# Altium PCB LAN7800-Board.PcbDoc (part 1 of 2)
Units mm, origin at the board's own origin, x right, y up, seen from the top; angles counter-clockwise.
Board outline 69 x 30 mm, 4 copper layers (Top Layer, Layer 1, Layer 2, Bottom Layer), stack 1.587 mm thick; 68 components, 49 nets, 280 pads, 123 vias.
Unrouted connection lines stored in the file: 60.
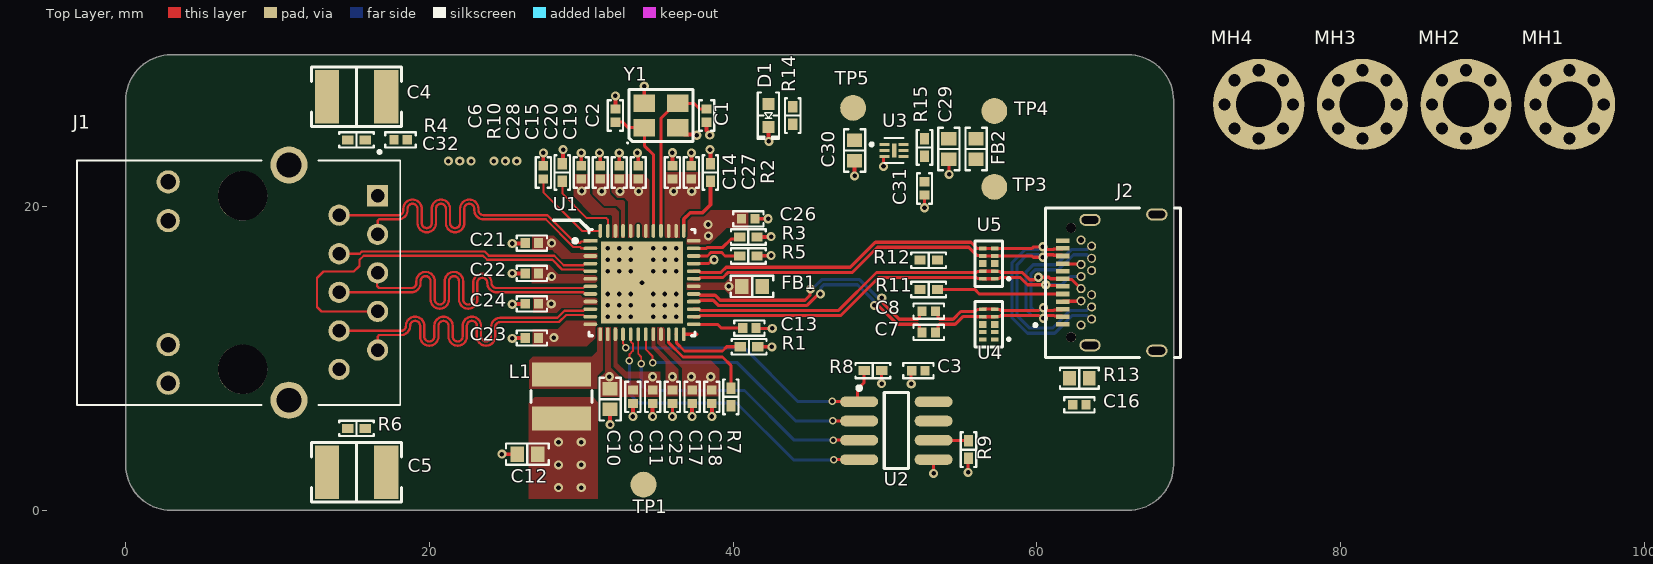
[diagram p0: Top Layer view]
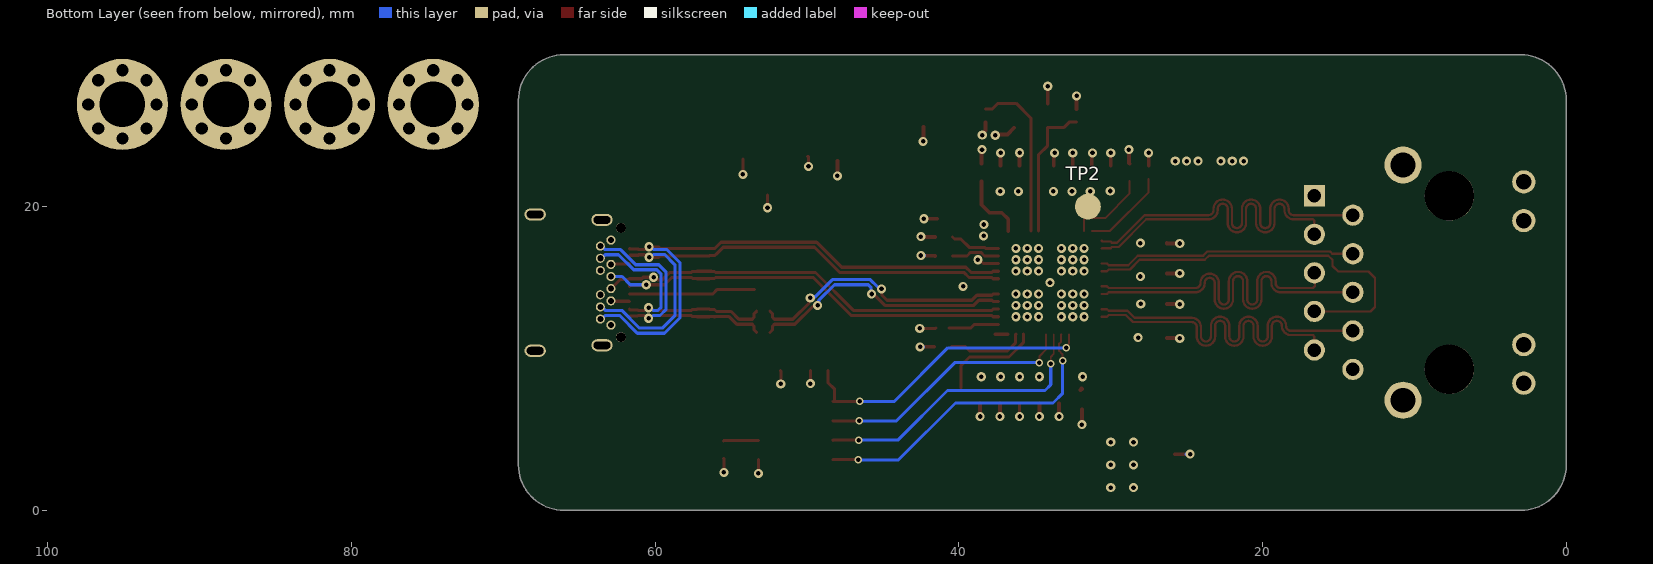
[diagram p1: Bottom Layer view, seen from below]
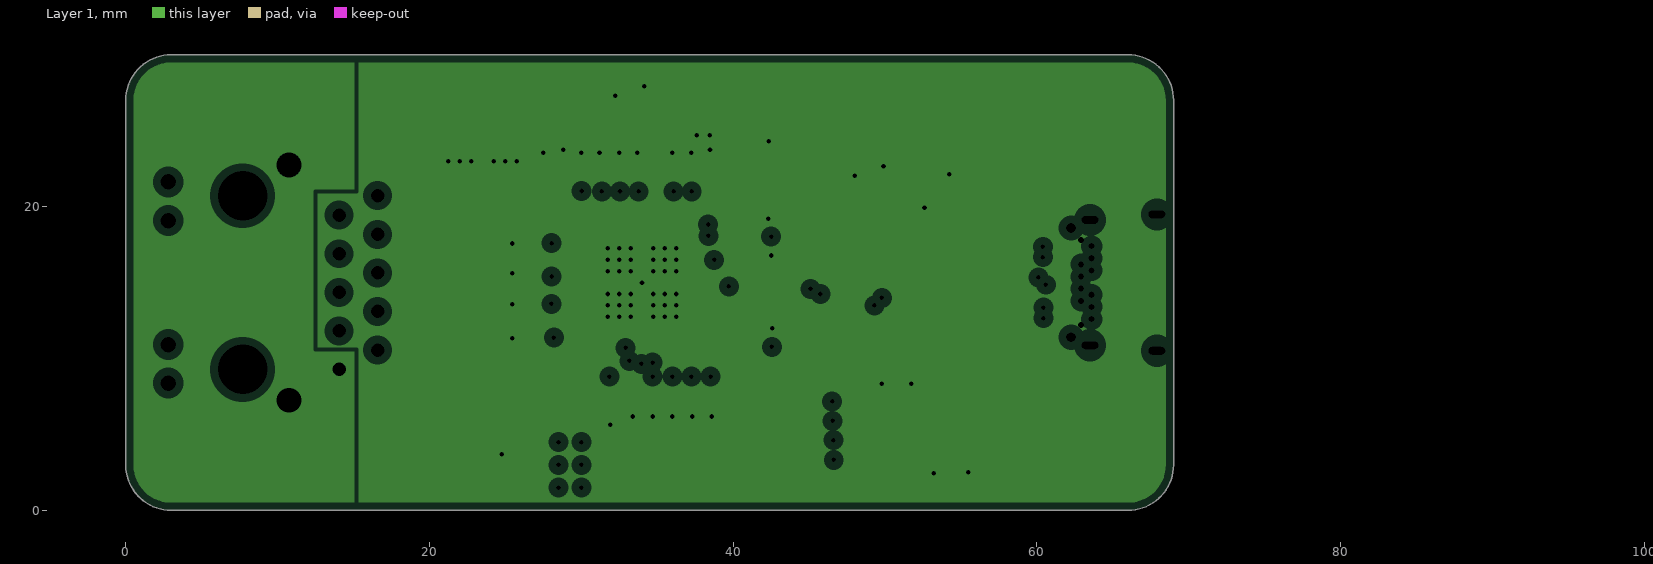
[diagram p2: Layer 1, clearances drawn from the general rule]
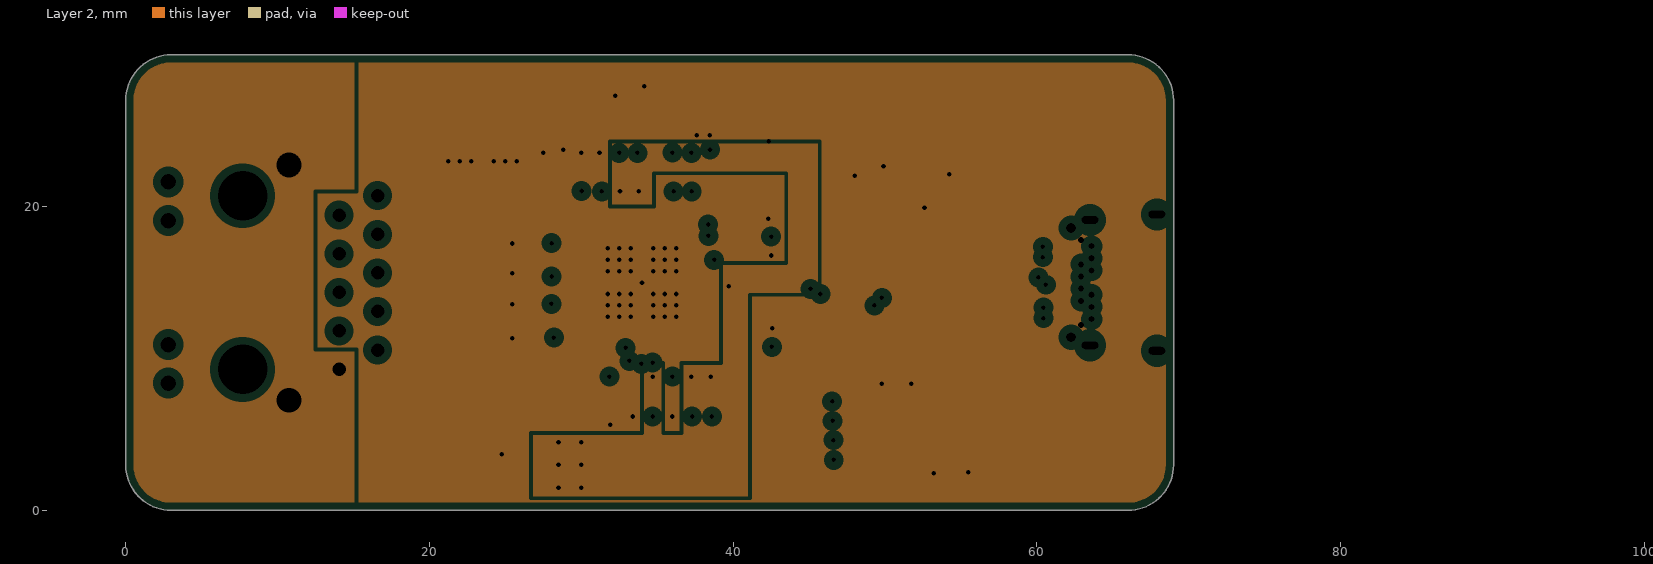
[diagram p3: Layer 2, clearances drawn from the general rule]

## Layer stack, top to bottom
Top Solder: solder mask 0.0102, Solder Resist, Dk 3.5
Top Layer: signal copper 0.0356
Dielectric 2: prepreg 0.2104, PP-023, Dk 4.4
Layer 1: plane copper 0.0152, net (Multiple Nets)
Dielectric 1: core 1.065, Core-042, Dk 4.6
Layer 2: plane copper 0.0152, net (Multiple Nets)
Dielectric 3: prepreg 0.2104, PP-023, Dk 4.4
Bottom Layer: signal copper 0.0356
Bottom Solder: solder mask 0.0102, Solder Resist, Dk 3.5

## Board outline
0,3 ccw(c3,3) 3,0 66,0 ccw(c66,3) 69,3 69,27 ccw(c66,27) 66,30 3,30 ccw(c3,27) 0,27

## Design rules (kind name [scope] priority, off if disabled: settings)
Clearance Clearance_1 [OnMid vs OnMid] p1: gap=0.127 ignorepadtopadclearanceinfootprint=FALSE except(0.09: Arc-THPad Arc-Via Arc-Hole Track-THPad Track-Via Track-Hole SMDPad-Hole THPad-THPad THPad-Via THPad-Text THPad-Hole Via-Via Via-Text Via-Hole Fill-Hole Poly-Hole Region-Hole Text-Hole) sourcerule=63 cellrowname=All cellrowtype=0 cellcolname=All cellcoltype=0 innerlayers=TRUE
Clearance Clearance_2 [(ExistsOnLayer('Top Layer') Or ExistsOnLayer('Bottom Layer')) vs (ExistsOnLayer('Top Layer') Or ExistsOnLayer('Bottom Layer'))] p2: gap=0.127 ignorepadtopadclearanceinfootprint=FALSE except(0.09: Arc-THPad Arc-Via Arc-Hole Track-THPad Track-Via Track-Hole SMDPad-Hole THPad-THPad THPad-Via THPad-Text THPad-Hole Via-Via Via-Text Via-Hole Fill-Hole Poly-Hole Region-Hole Text-Hole) sourcerule=63 cellrowname=All cellrowtype=0 cellcolname=All cellcoltype=0 outerlayers=TRUE
Clearance [All] p3: gap=0.254 ignorepadtopadclearanceinfootprint=FALSE except(0: Arc-Hole Track-Hole SMDPad-Hole THPad-Hole Via-Hole Fill-Hole Poly-Hole Region-Hole Text-Hole) ismatrix=TRUE
DiffPairsRouting DifferentialPairsRouting_4 [InDifferentialPair('D_TR1')] p1: maxlimit=0.127 minlimit=0.127 mostfreqgap=0.127 toplayer_minwidth=0.15 toplayer_maxwidth=0.15 toplayer_prefwidth=0.15 bottomlayer_minwidth=0.15 bottomlayer_maxwidth=0.15 bottomlayer_prefwidth=0.15 impedanceprofiledriven=TRUE impedanceprofileid={3817EC99-F858-40DC-AB09-DA09AABD2C5D} impedanceprofilevalue=100.000000 maxuncoupledlength=12.7
DiffPairsRouting DifferentialPairsRouting_5 [InDifferentialPair('D_TR2')] p2: maxlimit=0.127 minlimit=0.127 mostfreqgap=0.127 toplayer_minwidth=0.15 toplayer_maxwidth=0.15 toplayer_prefwidth=0.15 bottomlayer_minwidth=0.15 bottomlayer_maxwidth=0.15 bottomlayer_prefwidth=0.15 impedanceprofiledriven=TRUE impedanceprofileid={3817EC99-F858-40DC-AB09-DA09AABD2C5D} impedanceprofilevalue=100.000000 maxuncoupledlength=12.7
DiffPairsRouting DifferentialPairsRouting_6 [InDifferentialPair('D_TR3')] p3: maxlimit=0.127 minlimit=0.127 mostfreqgap=0.127 toplayer_minwidth=0.15 toplayer_maxwidth=0.15 toplayer_prefwidth=0.15 bottomlayer_minwidth=0.15 bottomlayer_maxwidth=0.15 bottomlayer_prefwidth=0.15 impedanceprofiledriven=TRUE impedanceprofileid={3817EC99-F858-40DC-AB09-DA09AABD2C5D} impedanceprofilevalue=100.000000 maxuncoupledlength=12.7
DiffPairsRouting DifferentialPairsRouting_7 [InDifferentialPair('D_USB_RX')] p4: maxlimit=0.127 minlimit=0.127 mostfreqgap=0.127 toplayer_minwidth=0.206 toplayer_maxwidth=0.206 toplayer_prefwidth=0.206 bottomlayer_minwidth=0.206 bottomlayer_maxwidth=0.206 bottomlayer_prefwidth=0.206 impedanceprofiledriven=TRUE impedanceprofileid={622B69F0-581B-4038-BA6E-10BA6067D3DC} impedanceprofilevalue=90.000000 maxuncoupledlength=12.7
DiffPairsRouting DifferentialPairsRouting_8 [InDifferentialPair('D_USB_TX')] p5: maxlimit=0.127 minlimit=0.127 mostfreqgap=0.127 toplayer_minwidth=0.206 toplayer_maxwidth=0.206 toplayer_prefwidth=0.206 bottomlayer_minwidth=0.206 bottomlayer_maxwidth=0.206 bottomlayer_prefwidth=0.206 impedanceprofiledriven=TRUE impedanceprofileid={622B69F0-581B-4038-BA6E-10BA6067D3DC} impedanceprofilevalue=90.000000 maxuncoupledlength=12.7
DiffPairsRouting DifferentialPairsRouting_9 [InDifferentialPair('D_USBC_D')] p6: maxlimit=0.127 minlimit=0.127 mostfreqgap=0.127 toplayer_minwidth=0.206 toplayer_maxwidth=0.206 toplayer_prefwidth=0.206 bottomlayer_minwidth=0.206 bottomlayer_maxwidth=0.206 bottomlayer_prefwidth=0.206 impedanceprofiledriven=TRUE impedanceprofileid={622B69F0-581B-4038-BA6E-10BA6067D3DC} impedanceprofilevalue=90.000000 maxuncoupledlength=12.7
DiffPairsRouting DifferentialPairsRouting_10 [InDifferentialPair('D_USBC_TX')] p7: maxlimit=0.127 minlimit=0.127 mostfreqgap=0.127 toplayer_minwidth=0.206 toplayer_maxwidth=0.206 toplayer_prefwidth=0.206 bottomlayer_minwidth=0.206 bottomlayer_maxwidth=0.206 bottomlayer_prefwidth=0.206 impedanceprofiledriven=TRUE impedanceprofileid={622B69F0-581B-4038-BA6E-10BA6067D3DC} impedanceprofilevalue=90.000000 maxuncoupledlength=12.7
DiffPairsRouting DifferentialPairsRouting_1 [InDifferentialPairClass('MDI_DIFFPAIR_50')] p8: maxlimit=0.127 minlimit=0.127 mostfreqgap=0.127 toplayer_minwidth=0.15 toplayer_maxwidth=0.15 toplayer_prefwidth=0.15 bottomlayer_minwidth=0.15 bottomlayer_maxwidth=0.15 bottomlayer_prefwidth=0.15 impedanceprofiledriven=TRUE impedanceprofileid={3817EC99-F858-40DC-AB09-DA09AABD2C5D} impedanceprofilevalue=100.000000 maxuncoupledlength=12.7
DiffPairsRouting DifferentialPairsRouting_2 [InDifferentialPairClass('USB_DIFFPAIR_90')] p9: maxlimit=0.127 minlimit=0.127 mostfreqgap=0.127 toplayer_minwidth=0.206 toplayer_maxwidth=0.206 toplayer_prefwidth=0.206 bottomlayer_minwidth=0.206 bottomlayer_maxwidth=0.206 bottomlayer_prefwidth=0.206 impedanceprofiledriven=TRUE impedanceprofileid={622B69F0-581B-4038-BA6E-10BA6067D3DC} impedanceprofilevalue=90.000000 maxuncoupledlength=12.7
DiffPairsRouting DifferentialPairsRouting_11 [InDifferentialPairClass('USB_DIFF')] p10: maxlimit=0.127 minlimit=0.127 mostfreqgap=0.127 toplayer_minwidth=0.206 toplayer_maxwidth=0.206 toplayer_prefwidth=0.206 bottomlayer_minwidth=0.206 bottomlayer_maxwidth=0.206 bottomlayer_prefwidth=0.206 impedanceprofiledriven=TRUE impedanceprofileid={622B69F0-581B-4038-BA6E-10BA6067D3DC} impedanceprofilevalue=90.000000 maxuncoupledlength=12.7
DiffPairsRouting DifferentialPairsRouting_12 [InDifferentialPairClass('MDI_DIFF')] p11: maxlimit=0.127 minlimit=0.127 mostfreqgap=0.127 toplayer_minwidth=0.15 toplayer_maxwidth=0.15 toplayer_prefwidth=0.15 bottomlayer_minwidth=0.15 bottomlayer_maxwidth=0.15 bottomlayer_prefwidth=0.15 impedanceprofiledriven=TRUE impedanceprofileid={3817EC99-F858-40DC-AB09-DA09AABD2C5D} impedanceprofilevalue=100.000000 maxuncoupledlength=12.7
DiffPairsRouting DifferentialPairsRouting_13 [InDifferentialPairClass('DIFF_MDI')] p12: maxlimit=0.127 minlimit=0.127 mostfreqgap=0.127 toplayer_minwidth=0.15 toplayer_maxwidth=0.15 toplayer_prefwidth=0.15 bottomlayer_minwidth=0.15 bottomlayer_maxwidth=0.15 bottomlayer_prefwidth=0.15 impedanceprofiledriven=TRUE impedanceprofileid={3817EC99-F858-40DC-AB09-DA09AABD2C5D} impedanceprofilevalue=100.000000 maxuncoupledlength=12.7
DiffPairsRouting DifferentialPairsRouting_14 [InDifferentialPairClass('DIFF_USB')] p13: maxlimit=0.127 minlimit=0.127 mostfreqgap=0.127 toplayer_minwidth=0.206 toplayer_maxwidth=0.206 toplayer_prefwidth=0.206 bottomlayer_minwidth=0.206 bottomlayer_maxwidth=0.206 bottomlayer_prefwidth=0.206 impedanceprofiledriven=TRUE impedanceprofileid={622B69F0-581B-4038-BA6E-10BA6067D3DC} impedanceprofilevalue=90.000000 maxuncoupledlength=12.7
DiffPairsRouting DifferentialPairsRouting_3 [InDifferentialPairClass('MDI_DIFFP')] p14: maxlimit=0.127 minlimit=0.127 mostfreqgap=0.127 toplayer_minwidth=0.15 toplayer_maxwidth=0.15 toplayer_prefwidth=0.15 bottomlayer_minwidth=0.15 bottomlayer_maxwidth=0.15 bottomlayer_prefwidth=0.15 impedanceprofiledriven=TRUE impedanceprofileid={3817EC99-F858-40DC-AB09-DA09AABD2C5D} impedanceprofilevalue=100.000000 maxuncoupledlength=12.7
DiffPairsRouting DifferentialPairsRouting_15 [InDifferentialPairClass('USB_DIFFP')] p15: maxlimit=0.127 minlimit=0.127 mostfreqgap=0.127 toplayer_minwidth=0.206 toplayer_maxwidth=0.206 toplayer_prefwidth=0.206 bottomlayer_minwidth=0.206 bottomlayer_maxwidth=0.206 bottomlayer_prefwidth=0.206 impedanceprofiledriven=TRUE impedanceprofileid={622B69F0-581B-4038-BA6E-10BA6067D3DC} impedanceprofilevalue=90.000000 maxuncoupledlength=12.7
DiffPairsRouting [All] p16: maxlimit=0.254 minlimit=0.254 mostfreqgap=0.254 toplayer_minwidth=0.381 toplayer_maxwidth=0.381 toplayer_prefwidth=0.381 bottomlayer_minwidth=0.381 bottomlayer_maxwidth=0.381 bottomlayer_prefwidth=0.381 maxuncoupledlength=12.7
HoleSize [All] p1: absolutevalues=TRUE maxlimit=6 minlimit=0.025 maxpercent=80.000 minpercent=20.000
HoleToHoleClearance [All] p1: gap=0.127 allowstackedmicrovias=TRUE
MatchedLengths MatchedLengths_USB [InDifferentialPairClass('USB_DIFFP')] p1: tolerance=0.254 checknetsindiffpair=FALSE checkdiffpairvsdiffpair=TRUE checkxsignals=TRUE checkothers=TRUE
MatchedLengths MatchedLengths_MDI [InDifferentialPairClass('MDI_DIFF')] p2: tolerance=0.254 checknetsindiffpair=FALSE checkdiffpairvsdiffpair=TRUE checkxsignals=TRUE checkothers=TRUE
MinimumSolderMaskSliver [All] p1: minsoldermaskwidth=0.01
PlaneClearance [All] p1: clearance=0.508
PlaneConnect PowerPlaneConnectStyle_1 [InNetClass('POWER')] p1: planeconnectstyle=Direct reliefexpansion=0.508 reliefentries=2 reliefconductorwidth=0.254 reliefairgap=0.254
PlaneConnect [All] p2: planeconnectstyle=Relief reliefexpansion=0.508 reliefentries=4 reliefconductorwidth=0.254 reliefairgap=0.254
PolygonConnect PolygonConnectStyle_1 [InNetClass('POWER')] p1: connectstyle=Direct reliefconductorwidth=0.254 reliefentries=4 polygonreliefangle="90 Angle" airgapwidth=0.254
PolygonConnect [All] p2: connectstyle=Relief reliefconductorwidth=0.254 reliefentries=4 polygonreliefangle="90 Angle" airgapwidth=0.254
ReturnPath ReturnPath_USB [InDifferentialPairClass('USB_DIFF')] p1: impedanceprofileid={622B69F0-581B-4038-BA6E-10BA6067D3DC} _gaplimit=0 _useantipads=TRUE
ReturnPath ReturnPath_MDI [InDifferentialPairClass('MDI_DIFF')] p2: impedanceprofileid={3817EC99-F858-40DC-AB09-DA09AABD2C5D} _gaplimit=0 _useantipads=TRUE
RoutingVias RoutingViaStyle_1 [InNet('EEPROM_CLK')] p1: holewidth=0.3 width=0.5 viastyle="Through Hole" minholewidth=0.3 minwidth=0.5 maxholewidth=0.3 maxwidth=0.5
RoutingVias RoutingViaStyle_2 [InNet('EEPROM_CS')] p2: holewidth=0.3 width=0.5 viastyle="Through Hole" minholewidth=0.3 minwidth=0.5 maxholewidth=0.3 maxwidth=0.5
RoutingVias RoutingViaStyle_3 [InNet('EEPROM_DI')] p3: holewidth=0.3 width=0.5 viastyle="Through Hole" minholewidth=0.3 minwidth=0.5 maxholewidth=0.3 maxwidth=0.5
RoutingVias RoutingViaStyle_4 [InNet('EEPROM_DO')] p4: holewidth=0.3 width=0.5 viastyle="Through Hole" minholewidth=0.3 minwidth=0.5 maxholewidth=0.3 maxwidth=0.5
RoutingVias [All] p5: holewidth=0.3 width=0.6 viastyle="Through Hole" minholewidth=0.3 minwidth=0.6 maxholewidth=0.3 maxwidth=0.6
SilkToSilkClearance [All] p1: silktosilkclearance=0.1
SilkToSolderMaskClearance [IsPad] p1: minsilkscreentomaskgap=0.1 clearancetoexposedcopper=TRUE
SolderMaskExpansion TentedVias [IsVia] p1: expansion=0.102 istentingtop=TRUE useseparateexpansions=TRUE expansionbottom=0.102 istentingbottom=TRUE
SolderMaskExpansion [All] p2: expansion=0.102 istentingtop=FALSE
Width MaxMinWidth_1 [InNetClass('POWER')] p1: maxlimit=0.254 minlimit=0.127 preferedwidth=0.254 minimp=50.000000 maximp=50.000000 favimp=50.000000
Width [All] p2: maxlimit=0.254 minlimit=0.09 preferedwidth=0.127 minimp=50.000000 maximp=50.000000 favimp=50.000000
22 further rules are at their usual default settings.

## Classes and differential pairs
differential pair class MDI_DIFFP: D_TR0 D_TR1 D_TR2 D_TR3
differential pair class USB_DIFFP: D_USB_RX D_USB_TX D_USBC_D D_USBC_TX
net class POWER: 3V3 5V EARTH_GND GND VBUS VDD12 VDD12_SW_OUT VDD25
net class LAN7800-Board_Nets: 3V3 5V CHS CT EARTH_GND EEPROM_CLK EEPROM_CS EEPROM_DI EEPROM_DO GND LED2 LED3 NetC6_2 NetC13_2 NetC31_2 NetD1_1 NetJ1_11 NetJ1_14 NetJ2_A5 NetJ2_B5 NetR9_2 NetR10_2 nRESET PMEN TEST TR0_N TR0_P TR1_N TR1_P TR2_N TR2_P TR3_N TR3_P USB_RX_N USB_RX_P USB_TX_N USB_TX_P USBC_D_N USBC_D_P USBC_TX_N USBC_TX_P USBRBIAS VBUS VBUS_DET VDD12 VDD12_SW_OUT VDD25 XI XO
differential pair D_USBC_TX: +USBC_TX_P -USBC_TX_N
differential pair D_USBC_D: +USBC_D_P -USBC_D_N
differential pair D_USB_TX: +USB_TX_P -USB_TX_N
differential pair D_USB_RX: +USB_RX_P -USB_RX_N
differential pair D_TR3: +TR3_P -TR3_N
differential pair D_TR2: +TR2_P -TR2_N
differential pair D_TR1: +TR1_P -TR1_N
differential pair D_TR0: +TR0_P -TR0_N

## Components (designator, comment, footprint, x,y, rotation, side; value= is the part's Value field where it differs from the comment)
C1 "16 pF" "CAP 0402_1005" 38.25,26 r90 top
C2 "16 pF" "CAP 0402_1005" 32.25,26 r270 top
C3 "0.1 µF" "CAP 0402_1005" 52.2,9.2 r0 top
C4 "1000pF" "CAP 1812_4532 2.8MM" 15.2,27.234 r180 top
C5 "1000pF" "CAP 1812_4532 2.8MM" 15.2,2.514 r180 top
C6 "1 µF" "CAP 0402_1005" 27.5,22.25 r270 top
C7 "0.1 µF" "CAP 0402_1005" 52.879,11.716 r0 top
C8 "0.1 µF" "CAP 0402_1005" 52.879,13.121 r0 top
C9 "0.1 µF" "CAP 0402_1005" 33.4,7.475 r90 top
C10 "10 µF" "CAP 0603_1608" 31.9,7.325 r90 top
C11 "0.1 µF" "CAP 0402_1005" 34.7,7.475 r90 top
C12 "22 µF" "CAP 0603_1608" 26.45,3.7 r0 top
C13 "1 µF" "CAP 0402_1005" 41.072,12.007 r180 top
C14 "1 µF" "CAP 0402_1005" 36,22.25 r270 top
C15 "1 µF" "CAP 0402_1005" 31.25,22.25 r270 top
C16 "0.1 µF" "CAP 0402_1005" 62.8,6.95 r180 top
C17 "0.1 µF" "CAP 0402_1005" 37.3,7.475 r90 top
C18 "0.1 µF" "CAP 0402_1005" 38.6,7.475 r90 top
C19 "0.1 µF" "CAP 0402_1005" 33.75,22.25 r270 top
C20 "0.1 µF" "CAP 0402_1005" 32.5,22.25 r270 top
C21 "0.1 µF" "CAP 0402_1005" 26.75,17.6 r0 top
C22 "0.1 µF" "CAP 0402_1005" 26.75,15.6 r0 top
C23 "0.1 µF" "CAP 0402_1005" 26.75,11.35 r0 top
C24 "0.1 µF" "CAP 0402_1005" 26.75,13.6 r0 top
C25 "0.1 µF" "CAP 0402_1005" 36,7.475 r90 top
C26 "0.1 µF" "CAP 0402_1005" 41,19.2 r180 top
C27 "0.1 µF" "CAP 0402_1005" 37.25,22.25 r270 top
C28 "0.1 µF" "CAP 0402_1005" 30,22.25 r270 top
C29 "10 µF" "CAP 0603_1608" 54.2,23.8 r90 top
C30 "10 µF" "CAP 0603_1608" 48,23.7 r90 top
C31 "0.1 µF" "CAP 0402_1005" 52.6,21.2 r90 top
C32 "0.1 µF" "CAP 0402_1005" 18.1,24.4 r180 top
D1 "Red" "LED 0603_1608 RED" 42.325,26 r270 top
FB1 "120 Ohms @ 100MHz" "FER 0603_1608" 41.25,14.75 r180 top
FB2 "120 Ohms @ 100 MHz" "FER 0603_1608" 56,23.8 r90 top
J1 "HR911130A" HANRUN_HR911130A 7.7,15 r270 top locked
J2 "12401832E402A" GCT_USB4056-03-A_REVA2 64.8,15 r90 top locked
L1 "3.3 µH" "TDK VLCF4024-2" 28.7,7.5 r270 top
MH1 "MountingHole" MountingHole_d6h3 95.084,26.734 r0 top
MH2 "MountingHole" MountingHole_d6h3 88.26,26.734 r0 top
MH3 "MountingHole" MountingHole_d6h3 81.436,26.734 r0 top
MH4 "MountingHole" MountingHole_d6h3 74.612,26.734 r0 top
R1 "10 kOhms" "RES 0402_1005" 41.05,10.775 r0 top
R2 "12 kOhms" "RES 0402_1005" 38.5,22.25 r90 top
R3 "10 kOhms" "RES 0402_1005" 41,18 r0 top
R4 "1 kOhms" "RES 0402_1005" 15.2,24.4 r0 top
R5 "10 kOhms" "RES 0402_1005" 41,16.75 r0 top
R6 "1 kOhms" "RES 0402_1005" 15.2,5.4 r0 top
R7 "10 kOhms" "RES 0402_1005" 39.85,7.475 r90 top
R8 "10 kOhms" "RES 0402_1005" 49.2,9.2 r180 top
R9 "10 kOhms" "RES 0402_1005" 55.5,4 r90 top
R10 "2 kOhms" "RES 0402_1005" 28.75,22.25 r270 top
R11 "5.1 kOhms" "RES 0402_1005" 52.879,14.55 r180 top
R12 "5.1 kOhms" "RES 0402_1005" 52.879,16.475 r180 top
R13 "330 Ohms" "RES 0603_1608" 62.8,8.7 r180 top
R14 "1 kOhms" "RES 0402_1005" 43.925,26 r270 top
R15 "10 kOhms" "RES 0402_1005" 52.6,23.9 r90 top
TP1 "TestPoint" "Rounded 1.7mm X 1.7mm"#1 34.5,1.75 r0 top
TP2 "TestPoint" "Rounded 1.7mm X 1.7mm"#2 31.5,20 r180 bottom
TP3 "TestPoint" "Rounded 1.7mm X 1.7mm"#2 57.2,21.3 r90 top
TP4 "TestPoint" "Rounded 1.7mm X 1.7mm"#2 57.2,26.3 r90 top
TP5 "TestPoint" "Rounded 1.7mm X 1.7mm"#2 47.9,26.5 r90 top
U1 "LAN7800/Y9X" FP-48SQFN-5304-7x7B-IPC_B 34,15 r0 top
U2 "93AA66C-I/SN" SOIC-SN8_M 50.75,5.25 r0 top
U3 "MIC5528-3.3YMX-TR" SON40P120X120X60-7N 50.6,23.7 r0 top
U4 "ESD7104MUTAG" ONSC-UDFN-10-517BB-01_V 56.825,12.25 r180 top
U5 "ESD7104MUTAG" ONSC-UDFN-10-517BB-01_V 56.825,16.25 r180 top
Y1 "25 MHz" "EPSON TSX-3225" 35.25,26 r0 top

## Footprints (in the part's own frame and the unit in brackets; to place one, negate y for a bottom-side part, rotate by r counter-clockwise, add the part's x,y. Pads: shape width x height; smd on the part's side, far side on the other; paste and mask are expansions set on the pad)
"CAP 0402_1005" [mm] "Chip Capacitor, 2-Leads, Body 1.02x0.51mm, IPC Medium Density"
  rect 0.6x0.64 smd: 1(-0.44,0) 2(0.44,0)
  silkscreen extent -1,-0.5 1,0.5, body extent -0.5,-0.26 0.5,0.26, height 0.52
"CAP 0603_1608" [mm] "Chip Capacitor, 2-Leads, Body 1.60x0.80mm, IPC Medium Density"
  rect 0.9x1 smd: 1(-0.675,0) 2(0.675,0)
  silkscreen extent -1.4,-0.7 1.4,0.7, body extent -0.8,-0.41 0.8,0.41, height 0.82
"CAP 1812_4532 2.8MM" [mm] "Chip Capacitor, 2-Leads, Body 4.50x3.20mm, IPC Medium Density"
  rect 1.6x3.5 smd: 1(-1.95,0) 2(1.95,0)
  silkscreen extent -2.95,-1.95 2.95,1.95, body extent -2.25,-1.6 2.25,1.6, height 2.8
"EPSON TSX-3225" [mm] "Crystal, 4-Leads, Body 2.50x3.20mm, Pitch 2.20mm, IPC Medium Density"
  rect 1.4x1.15 smd: 1(-1.1,-0.8) 2(1.1,-0.8) 3(1.1,0.8) 4(-1.1,0.8)
  silkscreen extent -2.25,-1.85 2.1,1.7, body extent -1.61,-1.26 1.61,1.26, height 0.6
"FER 0603_1608" [mm] "Chip Ferrite, 2-Leads, Body 1.60x0.80mm, IPC Medium Density"
  rect 0.9x1 smd: 1(-0.675,0) 2(0.675,0)
  silkscreen extent -1.4,-0.7 1.4,0.7, body extent -0.8,-0.41 0.8,0.41, height 0.82
FP-48SQFN-5304-7x7B-IPC_B [mm]
  rect 0.91x0.239 smd paste+0 mask+0: 1(-3.401,2.75)
  rrect100% 0.91x0.239 smd paste+0 mask+0: 2(-3.401,2.25) 3(-3.401,1.75) 4(-3.401,1.25) 5(-3.401,0.75) 6(-3.401,0.25) 7(-3.401,-0.25) 8(-3.401,-0.75) 9(-3.401,-1.25) 10(-3.401,-1.75) 11(-3.401,-2.25) 12(-3.401,-2.75) 25(3.401,-2.75) 26(3.401,-2.25) 27(3.401,-1.75) 28(3.401,-1.25) 29(3.401,-0.75) 30(3.401,-0.25) 31(3.401,0.25) 32(3.401,0.75) 33(3.401,1.25) 34(3.401,1.75) 35(3.401,2.25) 36(3.401,2.75)
  rrect100% 0.239x0.91 smd paste+0 mask+0: 13(-2.75,-3.401) 14(-2.25,-3.401) 15(-1.75,-3.401) 16(-1.25,-3.401) 17(-0.75,-3.401) 18(-0.25,-3.401) 19(0.25,-3.401) 20(0.75,-3.401) 21(1.25,-3.401) 22(1.75,-3.401) 23(2.25,-3.401) 24(2.75,-3.401) 37(2.75,3.401) 38(2.25,3.401) 39(1.75,3.401) 40(1.25,3.401) 41(0.75,3.401) 42(0.25,3.401) 43(-0.25,3.401) 44(-0.75,3.401) 45(-1.25,3.401) 46(-1.75,3.401) 47(-2.25,3.401) 48(-2.75,3.401)
  rect 5.4x5.4 smd paste-1000 mask+0: 49(0,0)
  silkscreen extent -4.53,-3.5 3.5,3.5, body extent -4.11,-4.11 4.11,4.11, height 0.25
GCT_USB4056-03-A_REVA2 [mm]
  rect 0.3x0.9 smd: A1(-2.75,3.1) A2(-2.25,3.1) A3(-1.75,3.1) A4(-1.25,3.1) A5(-0.75,3.1) A6(-0.25,3.1) A7(0.25,3.1) A8(0.75,3.1) A9(1.25,3.1) A10(1.75,3.1) A11(2.25,3.1) A12(2.75,3.1)
  round 0.6 hole 0.4: B1(2.8,1.89) B2(2.4,1.19) B3(1.6,1.19) B4(1.2,1.89) B5(0.8,1.19) B6(0.4,1.89) B7(-0.4,1.89) B8(-0.8,1.19) B9(-1.2,1.89) B10(-1.6,1.19) B11(-2.4,1.19) B12(-2.8,1.89)
  oval 0.8x1.4 hole 0.5 slot 1.1 at 90 deg: S(-4.49,-3.1) S(-4.13,1.3) S(4.13,1.3) S(4.49,-3.1)
  round 0.65 hole 0.65 unplated: ""(-3.6,2.54) ""(3.6,2.54)
  silkscreen extent -4.92,-4.65 4.93,5, body extent -4.92,-5.63 4.93,4.24, height 3.27
HANRUN_HR911130A [mm]
  rect 1.398x1.398 hole 0.89: 1(-5.72,8.89)
  round 1.398 hole 0.89: 2(-4.44,6.35) 3(-3.18,8.89) 4(-1.9,6.35) 5(-0.64,8.89) 6(0.64,6.35) 7(1.9,8.89) 8(3.18,6.35) 9(4.44,8.89) 10(5.72,6.35)
  round 1.53 hole 1.02: 11(-6.625,-4.9) 12(-4.085,-4.9) 13(4.085,-4.9) 14(6.625,-4.9)
  round 2.445 hole 1.63: S1(-7.745,3.05) S2(7.745,3.05)
  round 3.25 hole 3.25 unplated: ""(-5.715,0) ""(5.715,0)
  silkscreen extent -8.71,-10.92 8.05,10.38, body extent -7.93,-10.95 7.95,10.45, height 13.51
"LED 0603_1608 RED" [mm] "Chip Diode, 2-Leads, Body 1.60x0.80mm, IPC Medium Density"
  rect 0.8x0.8 smd: 1(-0.75,0) 2(0.75,0)
  silkscreen extent -1.52,-0.7 1.52,0.7, body extent -0.8,-0.4 0.8,0.4, height 0.53
MountingHole_d6h3 [mm] "Mounting hole 6mm diameter, 3mm hole, 0.8mm little hole"
  round 0.8 hole 0.8: 1(-2.25,0) 1(-1.591,-1.591) 1(-1.591,1.591) 1(0,-2.25) 1(0,2.25) 1(1.591,-1.591) 1(1.591,1.591) 1(2.25,0)
  round 6 hole 3: 1(0,0)
ONSC-UDFN-10-517BB-01_V [mm] "SON, 10-Leads, Body 2.5x1mm, Pitch 0.5mm"
  rect 0.5x0.25 smd: 1(-0.4,1) 2(-0.4,0.5) 4(-0.4,-0.5) 5(-0.4,-1) 6(0.4,-1) 7(0.4,-0.5) 9(0.4,0.5) 10(0.4,1)
  rect 0.5x0.45 smd: 3(-0.4,0) 8(0.4,0)
  silkscreen extent -1.37,-1.5 0.89,1.5, body extent -0.63,-1.25 0.63,1.25, height 0.65
"RES 0402_1005" [mm] "Chip Resistor, 2-Leads, Body 1.0x0.5mm, IPC Medium Density"
  rect 0.75x0.6 smd: 1(-0.575,0) 2(0.575,0)
  silkscreen extent -1.14,-0.51 1.14,0.51, body extent -0.5,-0.25 0.5,0.25, height 0.35
"RES 0603_1608" [mm] "Chip Resistor, 2-Leads, Body 1.60x0.80mm, IPC Medium Density"
  rect 0.85x0.95 smd: 1(-0.65,0) 2(0.65,0)
  silkscreen extent -1.27,-0.7 1.27,0.7, body extent -0.8,-0.4 0.8,0.4, height 0.45
"Rounded 1.7mm X 1.7mm"#1 [mm] "Rounded 1.7mm X 1.7mm Test Point"
  round 1.7 smd: 1(-0.4,-0.05)
"Rounded 1.7mm X 1.7mm"#2 [mm] "Rounded 1.7mm X 1.7mm Test Point"
  round 1.7 smd: 1(0,0)
SOIC-SN8_M [mm] "SOIC, 8-Leads, Body 4.9x3.9mm, Pitch 1.27mm, IPC Low Density"
  oval 2.5x0.7 smd: 1(-2.45,1.905) 2(-2.45,0.635) 3(-2.45,-0.635) 4(-2.45,-1.905) 5(2.45,-1.905) 6(2.45,-0.635) 7(2.45,0.635) 8(2.45,1.905)
  silkscreen extent -2.57,-2.5 0.8,2.93, body extent -3.02,-2.47 2.98,2.43, height 1.76
SON40P120X120X60-7N [mm]
  rrect25% 0.65x0.2 smd: 1(-0.625,0.4) 2(-0.625,0) 3(-0.625,-0.4) 4(0.625,-0.4) 5(0.625,0) 6(0.625,0.4)
  rect 0.3x0.94 smd paste-1: 7(0,0)
  silkscreen extent -1.57,-0.82 0.63,0.82, body extent -0.6,-0.6 0.6,0.6, height 0.61
"TDK VLCF4024-2" [mm] "Precision Wire Wound Inductor, 2-Leads, Body 4.00x4.00mm, IPC Medium Density"
  rect 1.6x3.9 smd: 1(-1.45,0) 2(1.45,0)
  silkscreen extent -0.4,-2 0.4,2, body extent -2.05,-2 2.05,2, height 2.4

## Part data
C1 C2: library part CBR04C160F5GAC, "CAP CER 16PF 50V C0G/NP0 0402", Device Package="0402 (1005 Metric)", manufacturer=KEMET, Operating Temperature="-55°C ~ 125°C", Supplier Part Number 1=399-8829-1-ND, Temperature Coefficient="C0G, NP0", Tolerance=±1%, Voltage - Rated=50V, Applications="RF, Microwave, High Frequency", Capacitance="16 pF", componentlink1description=Datasheet, componentlink1url=https://api.kemet.com/component-edge/download/datasheet/CBR04C160F5GAC.pdf, componentlink2description="DigiKey Link", componentlink2url=https://www.digikey.com/en/products/detail/kemet/CBR04C160F5GAC/3479638, Features="High Q, Low Loss, Ultra Low ESR", lastupdated="1/7/2024 8:04:48 PM", Lifecycle Status=Active, Minimum Order=1, Mounting Type="Surface Mount, MLCC", Package / Case="0402 (1005 Metric)", packaging=TapeAndReel, Part Number=CBR04C160F5GAC, Part Status=Active, partid=1751, price=0.06, series="CBR-SMD RF C0G", Size / Dimension="0.039\" L x 0.020\" W (1.00mm x 0.50mm)", Supplier 1=DigiKey, Thickness (Max)="0.022\" (0.55mm)"
C3 C9 C11 C17 C18 C19 C20 C21 C22 C23 C24 C25 C26 C27 C28 C31 C32: library part C0402C104K4RECAUTO, "CAP CER 0402 0.1UF 16V X7R 10%", Device Package="0402 (1005 Metric)", manufacturer=KEMET, Operating Temperature="-55°C ~ 125°C", Ratings=AEC-Q200, Supplier Part Number 1=399-17167-1-ND, Temperature Coefficient=X7R, Tolerance=±10%, Voltage - Rated=16V, Applications="Automotive, ESD Protection", Capacitance="0.1 µF", componentlink1description=Datasheet, componentlink1url=https://api.kemet.com/component-edge/download/datasheet/C0402C104K4RECAUTO.pdf, componentlink2description="DigiKey Link", componentlink2url=https://www.digikey.com/en/products/detail/kemet/C0402C104K4RECAUTO/8563695, lastupdated="1/6/2024 8:04:39 PM", Lifecycle Status=Active, Minimum Order=1, Mounting Type="Surface Mount, MLCC", Package / Case="0402 (1005 Metric)", packaging=TapeAndReel, Part Number=C0402C104K4RECAUTO, Part Status=Active, partid=1731, price=0.01, series="ESD SMD Auto X7R", Size / Dimension="0.039\" L x 0.020\" W (1.00mm x 0.50mm)", Supplier 1=DigiKey, Thickness (Max)="0.022\" (0.55mm)"
C4 C5: library part 1812WC102KAT1A, "CAP CER 1000PF 2.5KV X7R 1812", Device Package="1812 (4532 Metric)", manufacturer="AVX Corporation", Operating Temperature="-55°C ~ 125°C", Supplier Part Number 1=478-11410-1-ND, Temperature Coefficient=X7R, Tolerance=±10%, Voltage - Rated="2500V (2.5kV)", Applications="General Purpose", Capacitance=1000pF, componentlink1description=Datasheet, componentlink1url=http://datasheets.avx.com/AVX-HV_MLCC.pdf, componentlink2description="DigiKey Link", componentlink2url=http://digikey.com/product-detail/en/avx-corporation/1812WC102KAT1A/478-11410-1-ND/8019100, Features="High Voltage", lastupdated="9/2/2020 1:11:13 AM", Lifecycle Status=Active, Minimum Order=1, Mounting Type="Surface Mount, MLCC", Package / Case="1812 (4532 Metric)", packaging=TapeAndReel, Part Number=1812WC102KAT1A, Part Status=Active, price=0.53, series=-, Size / Dimension="0.181\" L x 0.126\" W (4.60mm x 3.20mm)", Supplier 1=DigiKey, Thickness (Max)="0.110\" (2.80mm)"
C6 C13 C14 C15: library part GRM155C71A105KE11D, "CAP CER 1UF 10V X7S 0402", Device Package="0402 (1005 Metric)", manufacturer="Murata Electronics", Operating Temperature="-55°C ~ 125°C", Supplier Part Number 1=490-14457-1-ND, Temperature Coefficient=X7S, Tolerance=±10%, Voltage - Rated=10V, Applications="General Purpose", Capacitance="1 µF", componentlink1description=Datasheet, componentlink1url=https://search.murata.co.jp/Ceramy/image/img/A01X/G101/ENG/GRM155C71A105KE11-01.pdf, componentlink2description="DigiKey Link", componentlink2url=https://www.digikey.com/en/products/detail/murata-electronics/GRM155C71A105KE11D/6606086, lastupdated="1/7/2024 8:04:48 PM", Lifecycle Status=Active, Minimum Order=1, Mounting Type="Surface Mount, MLCC", Package / Case="0402 (1005 Metric)", packaging=TapeAndReel, Part Number=GRM155C71A105KE11D, Part Status=Active, partid=1749, price=0.01, series=GRM, Size / Dimension="0.039\" L x 0.020\" W (1.00mm x 0.50mm)", Supplier 1=DigiKey, Thickness (Max)="0.024\" (0.60mm)"
C7 C8 C16: library part CGA2B3X5R1H104M050BB, "CAP CER 0.1UF 50V X5R 0402", Device Package="0402 (1005 Metric)", manufacturer="TDK Corporation", Operating Temperature="-55°C ~ 85°C", Ratings=AEC-Q200, Supplier Part Number 1=445-12214-1-ND, Temperature Coefficient=X5R, Tolerance=±20%, Voltage - Rated=50V, Applications=Automotive, Capacitance="0.1 µF", componentlink1description=Datasheet, componentlink1url=https://product.tdk.com/info/en/catalog/datasheets/mlcc_automotive_general_en.pdf?ref_disty=digikey, componentlink2description="DigiKey Link", componentlink2url=https://www.digikey.com/en/products/detail/tdk-corporation/CGA2B3X5R1H104M050BB/3949450, lastupdated="1/6/2024 8:04:39 PM", Lifecycle Status=Active, Minimum Order=1, Mounting Type="Surface Mount, MLCC", Package / Case="0402 (1005 Metric)", packaging=TapeAndReel, Part Number=CGA2B3X5R1H104M050BB, Part Status=Active, partid=1792, price=0.01, series=CGA, Size / Dimension="0.039\" L x 0.020\" W (1.00mm x 0.50mm)", Supplier 1=DigiKey, Thickness (Max)="0.022\" (0.55mm)"
C10 C29 C30: library part GRT188R61C106ME13D, "CAP CER 10UF 16V X5R 0603", Device Package="0603 (1608 Metric)", manufacturer="Murata Electronics", Operating Temperature="-55°C ~ 85°C", Ratings=AEC-Q200, Supplier Part Number 1=490-12318-1-ND, Temperature Coefficient=X5R, Tolerance=±20%, Voltage - Rated=16V, Applications=Automotive, Capacitance="10 µF", componentlink1description=Datasheet, componentlink1url=https://search.murata.co.jp/Ceramy/image/img/A01X/G101/ENG/GRT188R61C106ME13-01.pdf, componentlink2description="DigiKey Link", componentlink2url=https://www.digikey.com/en/products/detail/murata-electronics/GRT188R61C106ME13D/5416740, lastupdated="1/7/2024 8:10:13 PM", Lifecycle Status=Active, Minimum Order=1, Mounting Type="Surface Mount, MLCC", Package / Case="0603 (1608 Metric)", packaging=TapeAndReel, Part Number=GRT188R61C106ME13D, Part Status=Active, partid=2515, price=0.06, series=GRT, Size / Dimension="0.063\" L x 0.031\" W (1.60mm x 0.80mm)", Supplier 1=DigiKey, Thickness (Max)="0.035\" (0.90mm)"
C12: library part C1608X5R1A226M080AC, "CAP CER 22UF 10V X5R 0603", Device Package="0603 (1608 Metric)", manufacturer="TDK Corporation", Operating Temperature="-55°C ~ 85°C", Supplier Part Number 1=445-9077-1-ND, Temperature Coefficient=X5R, Tolerance=±20%, Voltage - Rated=10V, Applications="General Purpose", Capacitance="22 µF", componentlink1description=Datasheet, componentlink1url=https://product.tdk.com/info/en/catalog/datasheets/mlcc_commercial_general_en.pdf?ref_disty=digikey, componentlink2description="DigiKey Link", componentlink2url=https://www.digikey.com/en/products/detail/tdk-corporation/C1608X5R1A226M080AC/3661560, Features="Low ESL", lastupdated="1/7/2024 8:10:13 PM", Lifecycle Status=Active, Minimum Order=1, Mounting Type="Surface Mount, MLCC", Package / Case="0603 (1608 Metric)", packaging=TapeAndReel, Part Number=C1608X5R1A226M080AC, Part Status=Active, partid=2684, price=0.08, series=C, Size / Dimension="0.063\" L x 0.031\" W (1.60mm x 0.80mm)", Supplier 1=DigiKey, Thickness (Max)="0.039\" (1.00mm)"
D1: library part CSL0902VT1C, "HIGH BRIGHTNESS LENS TYPE, RED C", Current - Test=20mA, Device Package="0603 (1608 Metric)", Lens Color=Colorless, manufacturer="Rohm Semiconductor", Millicandela Rating=280mcd, Supplier Device Package=0603, Supplier Part Number 1=846-CSL0902VT1CCT-ND, Voltage - Forward (Vf) (Typ)=2.1V, Color=Red, componentlink1description=Datasheet, componentlink1url=https://fscdn.rohm.com/en/products/databook/datasheet/opto/led/chip_mono/CSL0902VT1(C)-e.pdf, componentlink2description="DigiKey Link", componentlink2url=https://www.digikey.com/en/products/detail/rohm-semiconductor/CSL0902VT1C/16285849, Height (Max)=1.34mm, lastupdated="1/6/2024 9:33:05 PM", Lens Size="1.14mm x 0.80mm", Lens Style="Rectangle with Domed Top", Lens Transparency=Clear, Lifecycle Status=Active, Minimum Order=1, Mounting Type="Surface Mount", Package / Case="0603 (1608 Metric)", packaging=TapeAndReel, Part Number=CSL0902VT1C, Part Status=Active, partid=1154, price=0.18, series=-, Size / Dimension="1.60mm L x 0.80mm W", Supplier 1=DigiKey, Wavelength - Dominant=630nm
FB1: library part Z0603C121ASMST, "FERRITE BEAD 120 OHM 0603 1LN", Current Rating (Max)=500mA, DC Resistance (DCR) (Max)=180mOhm, Device Package="0603 (1608 Metric)", manufacturer=KEMET, Operating Temperature="-55°C ~ 125°C", Supplier Part Number 1=399-9612-1-ND, componentlink1description=Datasheet, componentlink1url=https://content.kemet.com/datasheets/F3115.pdf, componentlink2description="DigiKey Link", componentlink2url=http://digikey.com/product-detail/en/kemet/Z0603C121ASMST/399-9612-1-ND/3674191, Filter Type="Signal Line", Height (Max)="0.037\" (0.95mm)", Impedance @ Frequency="120 Ohms @ 100MHz", lastupdated="1/7/2024 9:22:12 PM", Lifecycle Status=Active, Minimum Order=1, Mounting Type="Surface Mount", Number of Lines=1, Package / Case="0603 (1608 Metric)", packaging=TapeAndReel, Part Number=Z0603C121ASMST, Part Status=Active, partid=724, price=0.03, series=Z-SMS, Size / Dimension="0.063\" L x 0.032\" W (1.60mm x 0.80mm)", Supplier 1=DigiKey
FB2: library part BLM18AG121SH1D, "FERRITE BEAD 120 OHM 0603 1LN", Current Rating (Max)=800mA, DC Resistance (DCR) (Max)=180mOhm, Device Package="0603 (1608 Metric)", manufacturer="Murata Electronics", Operating Temperature="-55°C ~ 125°C", Ratings=AEC-Q200, Supplier Part Number 1=490-11024-1-ND, componentlink1description=Datasheet, componentlink1url=https://www.murata.com/en-us/products/productdata/8796733866014/S0594E.pdf, componentlink2description="DigiKey Link", componentlink2url=https://www.digikey.com/en/products/detail/murata-electronics/BLM18AG121SH1D/2587982, Height (Max)="0.037\" (0.95mm)", Impedance @ Frequency="120 Ohms @ 100 MHz", lastupdated="1/6/2024 9:25:04 PM", Lifecycle Status=Active, Minimum Order=1, Mounting Type="Surface Mount", Number of Lines=1, Package / Case="0603 (1608 Metric)", packaging=TapeAndReel, Part Number=BLM18AG121SH1D, Part Status=Active, partid=964, price=0.02, series="EMIFIL®, BLM18", Size / Dimension="0.063\" L x 0.032\" W (1.60mm x 0.80mm)", Supplier 1=DigiKey
J1: "Gigabit Ethernet with Magnetics", Package=None, Availability="Not in stock", Check_prices=https://www.snapeda.com/parts/HR911130A/HanRun/view-part/?ref=eda, MF=hanrun, MP=HR911130A, price=None, SnapEDA_Link=https://www.snapeda.com/parts/HR911130A/HanRun/view-part/?ref=snap
J2: library part USB4056-03-A, "24 Position Hybrid Top Mount USB Type C 3.2 Gen Receptacle", manufacturer="Global Connector Technology", Supplier Part Number=2158115, Category=Connectors, componentlink1description=https://datasheet.octopart.com/USB4056-03-A-Global-Connector-Technology-datasheet-169978561.pdf?src-supplier=Future+Electronics, componentlink1url=https://datasheet.octopart.com/USB4056-03-A-Global-Connector-Technology-datasheet-169978561.pdf?src-supplier=Future+Electronics, Manufacturer Part Number=USB4056-03-A, Pricing="1000=0,535, 2000=0,525, 3000=0,515, 4000=0,51, 5000=0,495 (USD)", RoHS=No, Stock=1000, Supplier="Future Electronics"
L1: library part VLCF4024T-3R3N1R6-2, "FIXED IND 3.3UH 1.6A 68 MOHM SMD", Current - Saturation=1.6A, Current Rating (Amps)="1.6 A", DC Resistance (DCR)="68mOhm Max", Device Package=Nonstandard, Inductance Frequency - Test="100 kHz", manufacturer="TDK Corporation", Operating Temperature="-40°C ~ 105°C", Supplier Part Number 1=445-8735-1-ND, Tolerance=±30%, componentlink1description=Datasheet, componentlink1url=https://product.tdk.com/info/en/catalog/datasheets/inductor_commercial_power_vlcf4024-2_en.pdf?ref_disty=digikey, componentlink2description="DigiKey Link", componentlink2url=https://www.digikey.com/en/products/detail/tdk-corporation/VLCF4024T-3R3N1R6-2/3083278, Height - Seated (Max)="0.094\" (2.40mm)", Inductance="3.3 µH", lastupdated="1/7/2024 9:32:15 PM", Lifecycle Status=Active, Material - Core=Ferrite, Minimum Order=1, Mounting Type="Surface Mount", Package / Case=Nonstandard, packaging=TapeAndReel, Part Number=VLCF4024T-3R3N1R6-2, Part Status=Active, partid=166, price=0.29, series=VLCF, Shielding=Shielded, Size / Dimension="0.157\" L x 0.157\" W (4.00mm x 4.00mm)", Supplier 1=DigiKey, Type="Drum Core, Wirewound"
MH1 MH2 MH3 MH4: "Plated mounting hole"
R1 R3 R5 R7 R8 R9 R15: library part RP73PF1E10KBTD, "RES 10K OHM 0.1% 1/10W 0402", Device Package="0402 (1005 Metric)", manufacturer="TE Connectivity Passive Product", Operating Temperature="-55°C ~ 155°C", Power (Watts)="0.1W, 1/10W", Supplier Device Package=0402, Supplier Part Number 1=A127415CT-ND, Temperature Coefficient=±25ppm/°C, Tolerance=±0.1%, componentlink1description=Datasheet, componentlink1url=https://www.te.com/commerce/DocumentDelivery/DDEController?Action=srchrtrv&DocNm=1773272&DocType=DS&DocLang=English, componentlink2description="DigiKey Link", componentlink2url=https://www.digikey.com/en/products/detail/te-connectivity-passive-product/RP73PF1E10KBTD/8260957, Composition="Thin Film", Height - Seated (Max)="0.014\" (0.35mm)", lastupdated="1/6/2024 8:29:32 PM", Lifecycle Status=Active, Minimum Order=1, Number of Terminations=2, Package / Case="0402 (1005 Metric)", packaging=TapeAndReel, Part Number=RP73PF1E10KBTD, Part Status=Active, partid=2434, price=0.08, Resistance="10 kOhms", series="RP73, Holsworthy", Size / Dimension="0.039\" L x 0.020\" W (1.00mm x 0.50mm)", Supplier 1=DigiKey
R2: library part CPF0402B12KE1, "RES SMD 12K OHM 0.1% 1/16W 0402", Device Package="0402 (1005 Metric)", manufacturer="TE Connectivity Passive Product", Operating Temperature="-55°C ~ 155°C", Power (Watts)="0.063W, 1/16W", Supplier Device Package=0402, Supplier Part Number 1=A102603CT-ND, Temperature Coefficient=±25ppm/°C, Tolerance=±0.1%, componentlink1description=Datasheet, componentlink1url=https://www.te.com/commerce/DocumentDelivery/DDEController?Action=srchrtrv&DocNm=1773200&DocType=DS&DocLang=English, componentlink2description="DigiKey Link", componentlink2url=https://www.digikey.com/en/products/detail/te-connectivity-passive-product/CPF0402B12KE1/2381830, Composition="Thin Film", Height - Seated (Max)="0.014\" (0.35mm)", lastupdated="1/7/2024 8:29:34 PM", Lifecycle Status=Active, Minimum Order=1, Number of Terminations=2, Package / Case="0402 (1005 Metric)", packaging=TapeAndReel, Part Number=CPF0402B12KE1, Part Status=Active, partid=3318, price=0.13, Resistance="12 kOhms", series="CPF, Neohm", Size / Dimension="0.039\" L x 0.020\" W (1.00mm x 0.50mm)", Supplier 1=DigiKey
R4 R6 R14: library part AT0402BRD071KL, "RES SMD 1K OHM 0.1% 1/16W 0402", Device Package="0402 (1005 Metric)", manufacturer=Yageo, Operating Temperature="-55°C ~ 155°C", Power (Watts)="0.063W, 1/16W", Ratings=AEC-Q200, Supplier Device Package=0402, Supplier Part Number 1=YAG2088CT-ND, Temperature Coefficient=±25ppm/°C, Tolerance=±0.1%, componentlink1description=Datasheet, componentlink1url=http://www.yageo.com/documents/recent/PYu-AT_51_RoHS_L_5.pdf, componentlink2description="DigiKey Link", componentlink2url=https://www.digikey.com/en/products/detail/yageo/AT0402BRD071KL/5138607, Composition="Thin Film", Features="Anti-Sulfur, Automotive AEC-Q200, Moisture Resistant", Height - Seated (Max)="0.014\" (0.35mm)", Lifecycle Status=Active, Minimum Order=1, Number of Terminations=2, Package / Case="0402 (1005 Metric)", packaging=TapeAndReel, Part Number=AT0402BRD071KL, Part Status=Active, partid=2462, price=0.08, Resistance="1 kOhms", series=AT, Size / Dimension="0.039\" L x 0.020\" W (1.00mm x 0.50mm)", Supplier 1=DigiKey
  R4 R6: lastupdated="1/7/2024 8:29:36 PM"
  R14: lastupdated="1/6/2024 8:29:32 PM"
R10: library part CPF0402B2K0E1, "RES SMD 2K OHM 0.1% 1/16W 0402", Device Package="0402 (1005 Metric)", manufacturer="TE Connectivity Passive Product", Operating Temperature="-55°C ~ 155°C", Power (Watts)="0.063W, 1/16W", Supplier Device Package=0402, Supplier Part Number 1=A102762CT-ND, Temperature Coefficient=±25ppm/°C, Tolerance=±0.1%, componentlink1description=Datasheet, componentlink1url=https://www.te.com/commerce/DocumentDelivery/DDEController?Action=srchrtrv&DocNm=1773200&DocType=DS&DocLang=English, componentlink2description="DigiKey Link", componentlink2url=https://www.digikey.com/en/products/detail/te-connectivity-passive-product/CPF0402B2K0E1/2381811, Composition="Thin Film", Height - Seated (Max)="0.014\" (0.35mm)", lastupdated="1/7/2024 8:29:34 PM", Lifecycle Status=Active, Minimum Order=1, Number of Terminations=2, Package / Case="0402 (1005 Metric)", packaging=TapeAndReel, Part Number=CPF0402B2K0E1, Part Status=Active, partid=3338, price=0.13, Resistance="2 kOhms", series="CPF, Neohm", Size / Dimension="0.039\" L x 0.020\" W (1.00mm x 0.50mm)", Supplier 1=DigiKey
R11 R12: library part RC0402JR-075K1L, "RES 5.1K OHM 5% 1/16W 0402", Device Package="0402 (1005 Metric)", manufacturer=Yageo, Operating Temperature="-55°C ~ 155°C", Power (Watts)="0.063W, 1/16W", Supplier Device Package=0402, Supplier Part Number 1=311-5.1KJRCT-ND, Temperature Coefficient=±100ppm/°C, Tolerance=±5%, componentlink1description=Datasheet, componentlink1url=https://www.yageo.com/upload/media/product/productsearch/datasheet/rchip/PYu-RC_Group_51_RoHS_L_10.pdf, componentlink2description="DigiKey Link", componentlink2url=https://www.digikey.com/en/products/detail/yageo/RC0402JR-075K1L/726487, Composition="Thick Film", Features="Moisture Resistant", Height - Seated (Max)="0.016\" (0.40mm)", lastupdated="1/6/2024 8:29:23 PM", Lifecycle Status=Active, Minimum Order=1, Number of Terminations=2, Package / Case="0402 (1005 Metric)", packaging=CutTape, Part Number=RC0402JR-075K1L, Part Status=Active, partid=4786, price=0.01, Resistance="5.1 kOhms", series=RC_L, Size / Dimension="0.039\" L x 0.020\" W (1.00mm x 0.50mm)", Supplier 1=DigiKey
R13: library part CRGH0603F330R, "RES SMD 330 OHM 1% 1/5W 0603", Device Package="0603 (1608 Metric)", manufacturer="TE Connectivity Passive Product", Operating Temperature="-55°C ~ 155°C", Power (Watts)="0.2W, 1/5W", Supplier Device Package=0603, Supplier Part Number 1=A129541CT-ND, Temperature Coefficient=±100ppm/°C, Tolerance=±1%, componentlink1description=Datasheet, componentlink1url=https://www.te.com/commerce/DocumentDelivery/DDEController?Action=srchrtrv&DocNm=1773204-1&DocType=DS&DocLang=English, componentlink2description="DigiKey Link", componentlink2url=https://www.digikey.com/en/products/detail/te-connectivity-passive-product/CRGH0603F330R/5586961, Composition="Thick Film", Height - Seated (Max)="0.022\" (0.55mm)", lastupdated="1/6/2024 8:41:06 PM", Lifecycle Status=Active, Minimum Order=1, Number of Terminations=2, Package / Case="0603 (1608 Metric)", packaging=TapeAndReel, Part Number=CRGH0603F330R, Part Status=Active, partid=5733, price=0.01, Resistance="330 Ohms", series="CRGH, Neohm", Size / Dimension="0.063\" L x 0.031\" W (1.60mm x 0.80mm)", Supplier 1=DigiKey
U1: "IC ETHERNET CTLR USB 48SQFN", Max Operating Temperature=70°C, Min Operating Temperature=0°C, Operating Supply Current=4mA, packaging=Tray, RoHS Compliant=Yes, series=-
U2: "4K, 512x8 or 256x16-bit, 1.8V Microwire Serial EEPROM, 8-Pin SOIC 150mil, Industrial Temperature", Code_IPC=SOIC127P600-8, Code_JEDEC=MS-012, DatasheetVersion="revD, May-2008", PackageDescription="8-Lead Plastic Small Outline (SN) - Narrow, 3.90mm Body [SOIC]", PackageReference=SOIC-SN8, PackageVersion="revBB, Aug-2009"